# Altium PCB PCB_Layout.PcbDoc (part 1 of 2)
Units mil, origin at the board's own origin, x right, y up, seen from the top; angles counter-clockwise.
Board outline 6000 x 4000 mil, 2 copper layers (Top Layer, Bottom Layer); 69 components, 66 nets, 256 pads, 9 vias.
Unrouted connection lines stored in the file: 15.
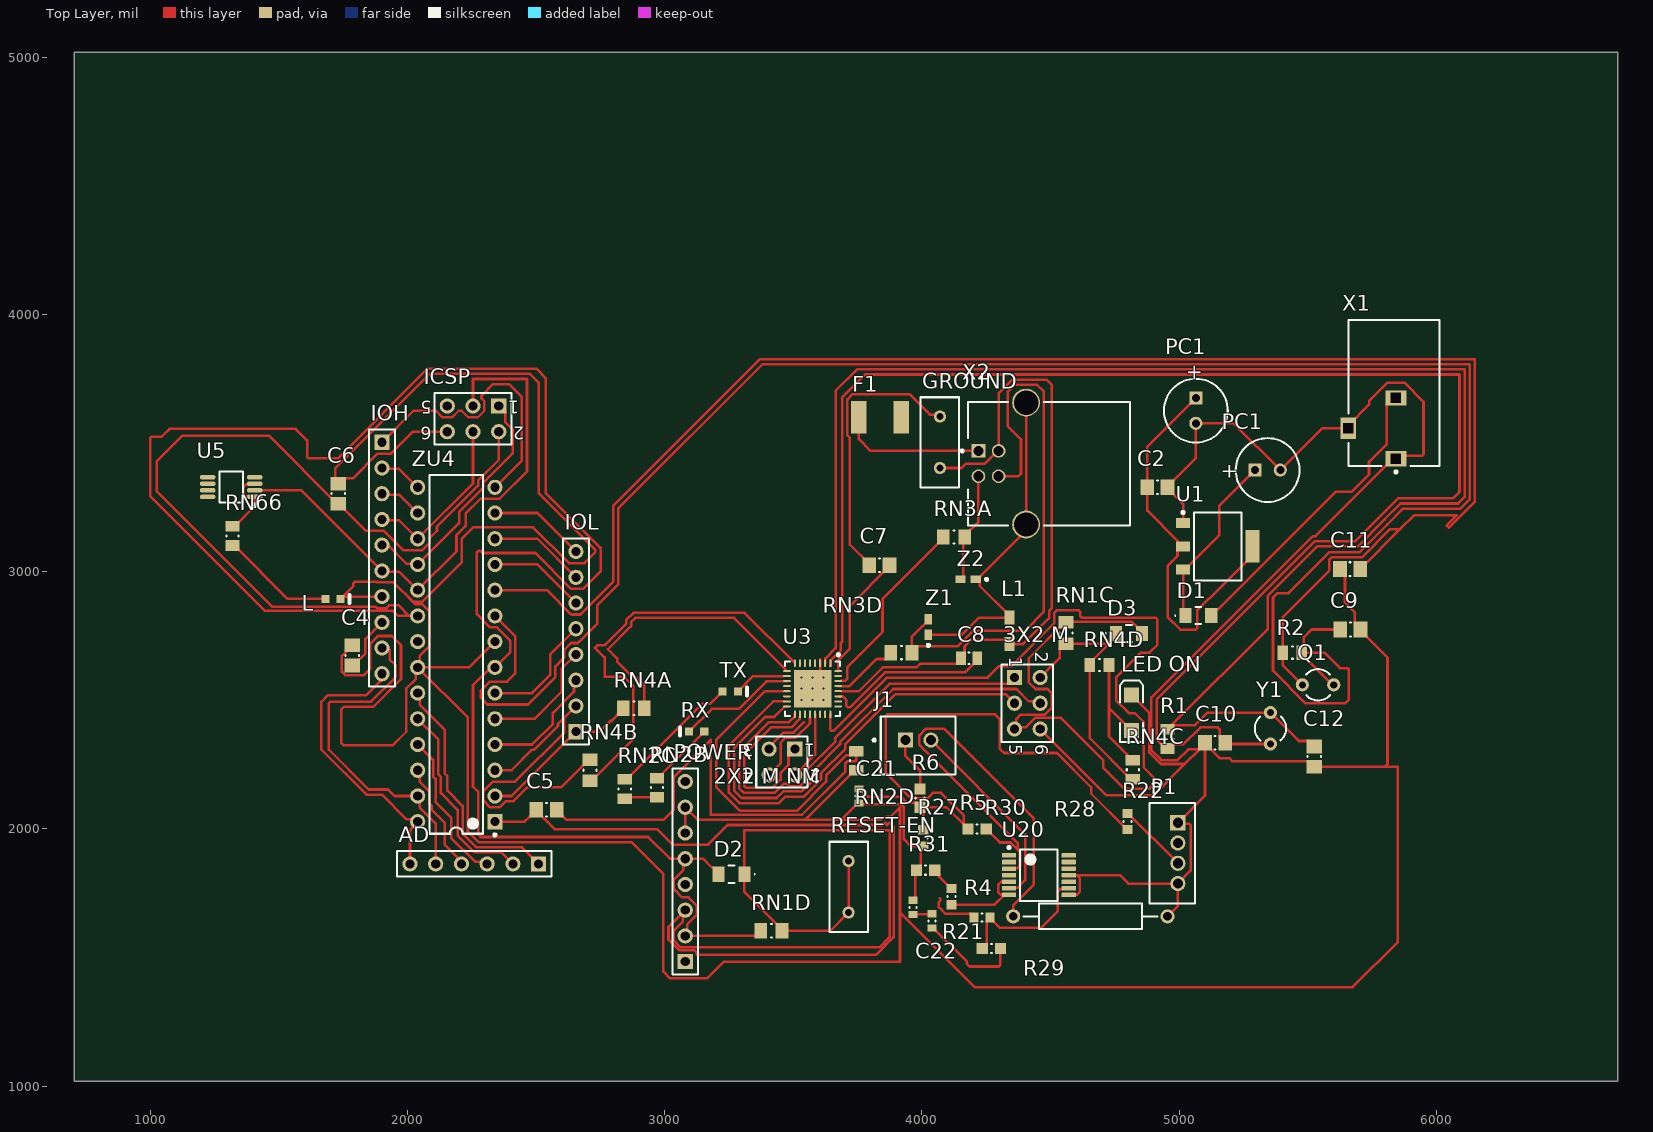
[diagram p0: Top Layer view]
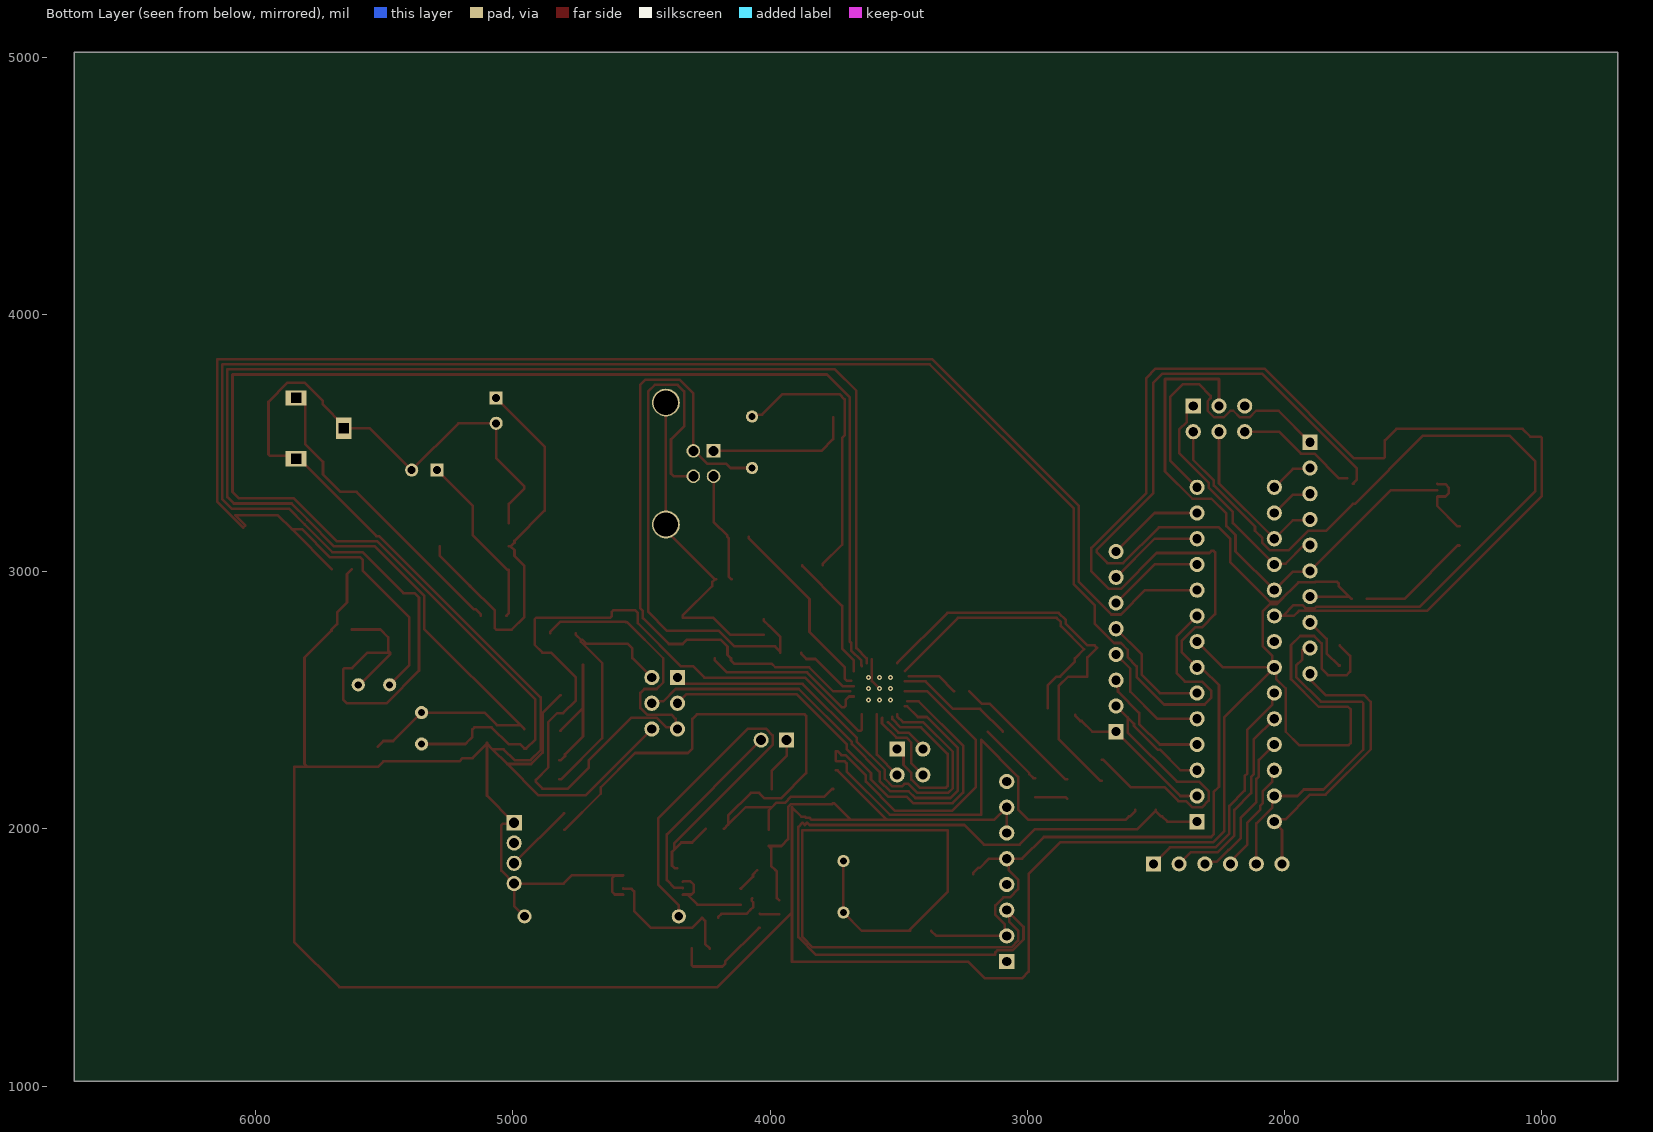
[diagram p1: Bottom Layer view, seen from below]

## Layer stack, top to bottom
Top Solder: solder mask 0.4, Solder Resist, Dk 3.5
Top Layer: signal copper 1.4
Dielectric 1: dielectric 12.6, FR-4, Dk 4.8
Bottom Layer: signal copper 1.4
Bottom Solder: solder mask 0.4, Solder Resist, Dk 3.5

## Board outline
705,1018.98 6705,1018.98 6705,5018.98 705,5018.98

## Design rules (kind name [scope] priority, off if disabled: settings)
Clearance [All] p1: gap=10 ignorepadtopadclearanceinfootprint=FALSE except(0: Arc-Hole Track-Hole SMDPad-Hole THPad-Hole Via-Hole Fill-Hole Poly-Hole Region-Hole Text-Hole)
DiffPairsRouting DiffPairsRouting_1 [All] p2 off: maxlimit=10 minlimit=10 mostfreqgap=10 toplayer_minwidth=15 toplayer_maxwidth=15 toplayer_prefwidth=15 bottomlayer_minwidth=15 bottomlayer_maxwidth=15 bottomlayer_prefwidth=15 maxuncoupledlength=500
PolygonConnect [All] p1: connectstyle=Relief reliefconductorwidth=10 reliefentries=4 polygonreliefangle="90 Angle" airgapwidth=10
RoomDefinition Sheet2 [InComponentClass('Sheet2')] p1: confinementstyle=ConfineIn formatcopy=TRUE lockcomponents=FALSE outline 6750,1080 7320,1080 7320,1440 6750,1440
RoomDefinition Sheet3 [InComponentClass('Sheet3')] p2: confinementstyle=ConfineIn formatcopy=TRUE lockcomponents=FALSE outline 6750,1078.98 7330,1078.98 7330,1478.98 6750,1478.98
RoomDefinition Sheet1 [InComponentClass('Sheet1')] p3: confinementstyle=ConfineIn formatcopy=TRUE lockcomponents=FALSE outline 1703.66,1887.95 7253.66,1887.95 7253.66,4187.95 1703.66,4187.95
RoutingVias [All] p1: holewidth=28 width=50 viastyle="Through Hole" minholewidth=28 minwidth=50 maxholewidth=28 maxwidth=50
SolderMaskExpansion [All] p1: expansion=4
Width [All] p1: maxlimit=10 minlimit=10 preferedwidth=10
30 further rules are at their usual default settings.

## Classes and differential pairs
component class Sheet2: "2X2 M NM" "3X2 M" C7 C8 C10 C12 D3 F1 GROUND L1 R1 RN1C RN2B RN2C RN2D RN3A RN3D RX TX U3 X2 Y1 Z1 Z2
component class Sheet3: C2 C21 C22 D1 J1 L "LED ON" P1 PC1 R4 R5 R6 R21 R22 R27 R28 R29 R30 R31 RN4C RN4D RN66 U1 U5 U20 X1
component class Sheet1: AD C4 C5 C6 C9 C11 D2 ICSP IOH IOL POWER Q1 R2 RESET-EN RN1D RN4A RN4B ZU4

## Components (designator, comment, footprint, x,y, rotation, side; value= is the part's Value field where it differs from the comment)
"2X2 M NM" "JP2" HDR2X2 3506.1,2310 r180 top
"3X2 M" "ICSP1" HDR2X3 4360,2588.31 r270 top
AD "6x1F-H8.5" HDR1X6 2510,1863.98 r180 top
C2 "100nF" CAPC0805(2012)100_M 4915.63,3327.95 r180 top
C4 "100nF" CAPC0805(2012)100_M 1785,2674.61 r270 top
C5 "100nF" CAPC0805(2012)100_M 2540.63,2073.98 r180 top
C6 "100nF" CAPC0805(2012)100_M 1730.63,3302.95 r90 top
C7 "100nF" CAPC0805(2012)100_M 3835,3025 r0 top
C8 "1uF" CAPC0805(2012)145_L 4183.5,2663.08 r0 top
C9 "22pF" CAPC0805(2012)100_M 5665.63,2775 r180 top
C10 "22pF" CAPC0805(2012)100_M 5140,2335 r180 top
C11 "22pF" CAPC0805(2012)100_M 5665,3010 r0 top
C12 "22pF" CAPC0805(2012)100_M 5525,2280.63 r270 top
C21 "100nF" CAPC0603(1608)100_L 3755,2127.44 r90 top
C22 "100nF" CAPC0603(1608)100_L 3965,1695 r90 top
D1 "M7" BOUR-CD1206-S01575-2_L 5075,2829.06 r180 top
D2 "CD1206-S01575" BOUR-CD1206-S01575-2_L 3259.8,1823.98 r0 top
D3 "CD1206-S01575" BOUR-CD1206-S01575-2_L 4805,2760 r180 top
F1 "MF-MSMF050-2" BOUR-MF-MSMF050-2_V 3837.32,3600 r0 top
GROUND "Jumper" RAD-0.2 4070,3502.95 r90 top
ICSP "3X2 M" HDR2X3 2355,3643.98 r180 top
IOH "10x1F-H8.5" HDR1X10 1900.86,3502.95 r270 top
IOL "8x1F-H8.5" HDR1X8 2655,2377.95 r90 top
J1 "" JST-B2B-XH-A_V 3985.79,2345 r0 top
L "Yellow" LTST-C190KSKT_V 1710.47,2893.98 r0 top
L1 "BLM21PG221SN1D" MURA-BLM21-B20-CHIP-2_V2 4340,2770 r90 top
"LED ON" "GREEN" 3.2X1.6X1.1 4815,2451.1 r90 top
P1 "B4B-PH-K-S(LF)(SN)" JST-B4B-PH-K-S_V 4973.35,1905.63 r270 top
PC1 "47u" PNSC-ECA-1HM470 5344.21,3395 r0 top
PC1 "47u" PNSC-ECA-1HM470 5065,3625.79 r270 top
POWER "8x1F-H8.5" HDR1X8 3080,1483.98 r90 top
Q1 "CSTCE16MOV53-R0" R38 5540,2560 r90 top
R1 "1M" RESC0805(2012)_N 4955,2350 r270 top value="1000000.00 Ohm"
R2 "1M" RESC0805(2012)_N 5440,2685 r0 top value="1000000.00 Ohm"
R4 "200K" RESC0603(1608)_M 4270,1535 r0 top value="200000.00 Ohm"
R5 "200K" RESC0603(1608)_M 4215.04,2000 r0 top value="200000.00 Ohm"
R6 "200K" RESC0603(1608)_M 3993.19,2119.57 r90 top value="200000.00 Ohm"
R21 "" AXIAL-0.6 4655,1660 r0 top value=200K
R22 "4K7" RESC0603(1608)_N 4800,2028.5 r90 top value="4700.00 Ohm"
R27 "4K7" RESC0603(1608)_N 4005.35,1965 r90 top value="4700.00 Ohm"
R28 "100K" RESC0603(1608)_N 4233.5,1655 r0 top value="100000.00 Ohm"
R29 "1M" RESC0603(1608)_L 4040,1642.44 r90 top value="1000000.00 Ohm"
R30 "100K" RESC0603(1608)_N 4115,1736.73 r90 top value="100000.00 Ohm"
R31 "200K" RESC0603(1608)_M 4014.57,1839.45 r0 top value="200000.00 Ohm"
RESET-EN "Jumper" RAD-0.2 3715,1775 r90 top
RN1C "10K" RESC0805(2012)_M 4560,2761.61 r90 top value="10000.00 Ohm"
RN1D "10K" RESC0805(2012)_M 3415,1603.98 r0 top value="10000.00 Ohm"
RN2B "1K" RESC0805(2012)_N 2970,2160 r270 top value="1000.00 Ohm"
RN2C "1K" RESC0805(2012)_N 2845,2155 r270 top value="1000.00 Ohm"
RN2D "1K" RESC0805(2012)_N 3745,2265 r270 top value="1000.00 Ohm"
RN3A "22R" RESC0805(2012)_M 4125,3135 r180 top value="22.00 Ohm"
RN3D "22R" RESC0805(2012)_M 3920,2685 r180 top value="22.00 Ohm"
RN4A "1K" RESC0805(2012)_M 2880,2468.98 r180 top value="1000.00 Ohm"
RN4B "1K" RESC0805(2012)_M 2710,2227.95 r90 top value="1000.00 Ohm"
RN4C "1K" RESC0805(2012)_N 4820,2229.8 r90 top value="1000.00 Ohm"
RN4D "1K" RESC0805(2012)_N 4690,2637.6 r0 top value="1000.00 Ohm"
RN66 "1K 5% 0805(2012)" RESC0805(2012)_N 1320,3138.98 r90 top value="1000.00 Ohm"
RX "Yellow" LTST-C190KSKT_V 3124.53,2377.95 r180 top
TX "Yellow" LTST-C190KSKT_V 3255,2534.41 r0 top
U1 "NCP1117ST50T3G" ONSC-SOT-223_N 5150.16,3098.28 r0 top
U3 "ATmega16U2-MU" 32PG_N 3575,2545 r270 top
U5 "LMV358IDGKR" DGK0008A_M 1315,3328.98 r180 top
U20 "LM324MTX" PW0014A_N 4455,1820 r0 top
X1 "POWERSUPPLY_DC21MMX" CUI-PJ-102A_V 5835,3695 r0 top
X2 "USB-B_TH" FCI-61729-0010BLF-6_V 4495,3420 r90 top
Y1 "CSTCE16MOV53-R0" R38 5355,2391.02 r0 top
Z1 "CG0603MLC-05E" BOUR-CG0603-2_V 4025,2785 r90 top
Z2 "CG0603MLC-05E" BOUR-CG0603-2_V 4180,2970 r180 top
ZU4 "ATmega328-PU" 28P3 2190,2677.95 r180 top

## Footprints (in the part's own frame and the unit in brackets; to place one, negate y for a bottom-side part, rotate by r counter-clockwise, add the part's x,y. Pads: shape width x height; smd on the part's side, far side on the other; paste and mask are expansions set on the pad)
3.2X1.6X1.1 [mm] "SMT LED; 2 Flat Leads"
  rect 1.5x1.5 smd: 1(-1.75,0) 2(1.75,0)
  silkscreen extent -2.9,-1.15 3.2,1.15
28P3 [mm] "28-Pin Plastic Dual In-Line Package (PDIP)"
  rect 1.5x1.5 hole 0.9: 1(-3.81,16.51)
  round 1.5 hole 0.9: 2(-3.81,13.97) 3(-3.81,11.43) 4(-3.81,8.89) 5(-3.81,6.35) 6(-3.81,3.81) 7(-3.81,1.27) 8(-3.81,-1.27) 9(-3.81,-3.81) 10(-3.81,-6.35) 11(-3.81,-8.89) 12(-3.81,-11.43) 13(-3.81,-13.97) 14(-3.81,-16.51) 15(3.81,-16.51) 16(3.81,-13.97) 17(3.81,-11.43) 18(3.81,-8.89) 19(3.81,-6.35) 20(3.81,-3.81) 21(3.81,-1.27) 22(3.81,1.27) 23(3.81,3.81) 24(3.81,6.35) 25(3.81,8.89) 26(3.81,11.43) 27(3.81,13.97) 28(3.81,16.51)
  silkscreen extent -3.94,-17.7 2.65,17.93, body extent -3.6,-17.65 3.6,17.65, height 4.58
32PG_N [mm] "QFN, 32-Leads, Body 5x5mm, Pitch 0.5mm, Thermal Pad 3.7x3.7mm, IPC Medium Density"
  oval 0.75x0.2 smd: 1(-2.525,1.75) 2(-2.525,1.25) 3(-2.525,0.75) 4(-2.525,0.25) 5(-2.525,-0.25) 6(-2.525,-0.75) 7(-2.525,-1.25) 8(-2.525,-1.75) 17(2.525,-1.75) 18(2.525,-1.25) 19(2.525,-0.75) 20(2.525,-0.25) 21(2.525,0.25) 22(2.525,0.75) 23(2.525,1.25) 24(2.525,1.75)
  oval 0.2x0.75 smd: 9(-1.75,-2.525) 10(-1.25,-2.525) 11(-0.75,-2.525) 12(-0.25,-2.525) 13(0.25,-2.525) 14(0.75,-2.525) 15(1.25,-2.525) 16(1.75,-2.525) 25(1.75,2.525) 26(1.25,2.525) 27(0.75,2.525) 28(0.25,2.525) 29(-0.25,2.525) 30(-0.75,2.525) 31(-1.25,2.525) 32(-1.75,2.525)
  rect 3.7x3.7 smd: 33(0,0)
  silkscreen extent -3.47,-2.7 2.7,2.7, body extent -2.55,-2.55 2.55,2.55, height 1
AXIAL-0.6 [mm] "Axial Device, Thru-Hole; 2 Leads; 0.6 in Pin Spacing"
  round 1.4 hole 0.85: 1(-7.62,0) 2(7.62,0)
  silkscreen extent -6.6,-1.27 6.6,1.27
BOUR-CD1206-S01575-2_L [mm] "Molded Diode, 2-Leads, Body 3.4x1.7mm, IPC High Density"
  rect 1.2x1.5 smd: 1(-1.275,0) 2(1.275,0)
  silkscreen extent -0.28,-0.85 2.32,0.85, body extent -1.7,-0.85 1.7,0.85, height 0.95
BOUR-CG0603-2_V [mm] "SMD, 2-Leads, Body 1.6x0.8mm, Pitch 1.52mm"
  rect 1.02x0.76 smd: 1(-0.76,0) 2(0.76,0)
  silkscreen extent -1.94,-0.13 -1.7,0.12, body extent -0.8,-0.4 0.8,0.4, height 0.55
BOUR-MF-MSMF050-2_V [mm] "SMD, 2-Leads, Body 4.55x3.24mm"
  rect 1.5x3.2 smd: 1(-2.1,0) 2(2.1,0)
  body extent -2.28,-1.62 2.28,1.62, height 0.85
CAPC0603(1608)100_L [mm] "Chip Capacitor, Body 1.6x0.8mm, Height 1.0mm, IPC High Density"
  rect 0.7x0.9 smd: 1(-0.7,0) 2(0.7,0)
  silkscreen extent -0.05,-0.35 0.05,0.35, body extent -0.87,-0.47 0.88,0.48, height 1
CAPC0805(2012)100_M [mm] "Chip Capacitor, Body 2.0x1.2mm, Height 1.0mm, IPC Low Density"
  rect 1.35x1.55 smd: 1(-1,0) 2(1,0)
  silkscreen extent -0.05,-0.67 0.05,0.67, body extent -1.1,-0.72 1.1,0.72, height 1
CAPC0805(2012)145_L [mm] "Chip Capacitor, Body 2.0x1.2mm, Height 1.45mm, IPC High Density"
  rect 0.95x1.35 smd: 1(-0.8,0) 2(0.8,0)
  silkscreen extent -0.05,-0.58 0.05,0.58, body extent -1.1,-0.72 1.1,0.72, height 1.45
CUI-PJ-102A_V [mm] "THD, 3-Leads, Body 14.4x9mm, Pitch 3mm"
  rect 2.1x1.5 hole 1 square: 1(0.2,-6.5) 2(0.2,-0.5)
  rect 1.5x2.1 hole 1 square: 3(-4.5,-3.5)
  silkscreen extent -4.5,-7.92 4.5,7.2, body extent -4.7,-7.2 4.7,7.2, height 11.5
DGK0008A_M [mm] "TSOP, 8-Leads, Body 3.1x3.1mm, Pitch 0.65mm, IPC Low Density"
  oval 1.55x0.45 smd: 1(-2.325,0.975) 2(-2.325,0.325) 3(-2.325,-0.325) 4(-2.325,-0.975) 5(2.325,-0.975) 6(2.325,-0.325) 7(2.325,0.325) 8(2.325,0.975)
  silkscreen extent -2.45,-1.55 1.15,1.92, body extent -2.45,-1.5 2.45,1.5, height 0.94
FCI-61729-0010BLF-6_V [mm] "Through Hole, 6-Leads, Body 12.2x16mm"
  rect 1.35x1.35 hole 1: 1(1.254,6.99)
  round 1.35 hole 1: 2(-1.246,6.99) 3(-1.246,4.99) 4(1.254,4.99)
  round 2.75 hole 2.4: MH1(-6.016,2.28) MH2(6.024,2.28)
  silkscreen extent -6.1,-8 6.1,8.72, body extent -7.17,-8 7.17,8, height 11.14
HDR1X6 [mm] "Connector; Header; 6 Position"
  rect 1.5x1.5 hole 0.9: 1(0,0)
  round 1.5 hole 0.9: 2(2.54,0) 3(5.08,0) 4(7.62,0) 5(10.16,0) 6(12.7,0)
  silkscreen extent -1.27,-1.27 13.97,1.27
HDR1X8 [mm] "Connector; Header; 8 Position"
  rect 1.5x1.5 hole 0.9: 1(0,0)
  round 1.5 hole 0.9: 2(2.54,0) 3(5.08,0) 4(7.62,0) 5(10.16,0) 6(12.7,0) 7(15.24,0) 8(17.78,0)
  silkscreen extent -1.27,-1.27 19.05,1.27
HDR1X10 [mm] "Connector; Header; 10 Position"
  rect 1.5x1.5 hole 0.9: 1(0,0)
  round 1.5 hole 0.9: 2(2.54,0) 3(5.08,0) 4(7.62,0) 5(10.16,0) 6(12.7,0) 7(15.24,0) 8(17.78,0) 9(20.32,0) 10(22.86,0)
  silkscreen extent -1.27,-1.27 24.13,1.27
HDR2X2 [mm] "Connector; Header; 2x2 Position"
  rect 1.5x1.5 hole 0.9: 1(0,0)
  round 1.5 hole 0.9: 2(0,2.54) 3(2.54,0) 4(2.54,2.54)
  silkscreen extent -1.27,-1.27 3.81,3.81
HDR2X3 [mm] "Connector; Header; 3x2 Position"
  rect 1.5x1.5 hole 0.9: 1(0,0)
  round 1.5 hole 0.9: 2(0,2.54) 3(2.54,0) 4(2.54,2.54) 5(5.08,0) 6(5.08,2.54)
  silkscreen extent -1.27,-1.27 6.35,3.81
JST-B2B-XH-A_V [mm] "Header, 2-Leads, Body 7.4x5.75mm, Pitch 2.5mm"
  rect 1.5x1.5 hole 1: 1(-1.25,0)
  round 1.5 hole 1: 2(1.25,0)
  silkscreen extent -4.47,-3.4 3.7,2.35, body extent -3.7,-3.4 3.7,2.35, height 7
JST-B4B-PH-K-S_V [mm] "Connector, 4-Leads, Body 9.9x4.5mm, Pitch 2mm"
  rect 1.5x1.5 hole 1: 1(-3,0.55)
  round 1.5 hole 1: 2(-1,0.55) 3(1,0.55) 4(3,0.55)
  silkscreen extent -4.95,-2.25 4.95,2.25, body extent -4.95,-2.25 4.95,2.25, height 6
LTST-C190KSKT_V [mm] "SMD, 2-Leads, Body 1.6x0.8mm"
  rect 0.8x0.8 smd: 1(-0.75,0) 2(0.75,0)
  silkscreen extent 1.65,-0.4 1.65,0.4, body extent -0.8,-0.4 0.8,0.4, height 0.9
MURA-BLM21-B20-CHIP-2_V2 [mm] "Chip Ferrite Bead, 2-Leads, Body 2x1.25mm, Height 1.05mm, 35/70um Land Pad Thickness, 2A Rated Current"
  rect 1.4x1 smd: 1(-1.3,0) 2(1.3,0)
  body extent -1,-0.63 1,0.63, height 1.05
ONSC-SOT-223_N [mm] "SOT223, 4-Leads, Body 3.7x6.7mm, Pitch 2.3mm, IPC Medium Density"
  rect 1.35x1 smd: 1(-3.425,2.3) 2(-3.425,0) 3(-3.425,-2.3)
  rect 1.35x3.2 smd: 4(3.425,0)
  silkscreen extent -3.55,-3.35 2.35,3.47, body extent -1.85,-3.35 1.85,3.35, height 1.8
PNSC-ECA-1HM470 [mm]
  rect 1.3x1.3 hole 0.8: 1(-1.25,0)
  round 1.3 hole 0.8: 2(1.25,0)
  silkscreen extent -3.15,-3.15 3.15,3.15, body extent -3.15,-3.15 3.15,3.15, height 12.2
PW0014A_N [mm] "SOP, 14-Leads, Body 5.1x4.5mm, Pitch 0.65mm, IPC Medium Density"
  rrect22% 1.4x0.45 smd: 1(-2.95,1.95) 2(-2.95,1.3) 3(-2.95,0.65) 4(-2.95,0) 5(-2.95,-0.65) 6(-2.95,-1.3) 7(-2.95,-1.95) 8(2.95,-1.95) 9(2.95,-1.3) 10(2.95,-0.65) 11(2.95,0) 12(2.95,0.65) 13(2.95,1.3) 14(2.95,1.95)
  silkscreen extent -3.07,-2.55 1.85,2.85, body extent -3.21,-2.5 3.21,2.5, height 1
R38 [mm] "Crystal, Thru-Hole; 2 Leads; Body 3.1 x 8.2 mm (Dia.xH)"
  round 1.3 hole 0.7: 1(0,1.55) 2(0,-1.55)
  silkscreen extent -1.55,-1.19 1.55,1.17
RAD-0.2 [mm] "Radial Cap, Thru-Hole; 2 Leads; 0.2 in Pin Spacing"
  round 1.2 hole 0.7: 1(-2.54,0) 2(2.54,0)
  silkscreen extent -4.44,-1.91 4.44,1.91
RESC0603(1608)_L [mm] "Chip Resistor, Body 1.6x0.8mm, IPC High Density"
  rect 0.7x0.9 smd: 1(-0.7,0) 2(0.7,0)
  silkscreen extent -0.05,-0.35 0.05,0.35, body extent -0.85,-0.47 0.85,0.47, height 0.6
RESC0603(1608)_M [mm] "Chip Resistor, Body 1.6x0.8mm, IPC Low Density"
  rect 1.1x1.1 smd: 1(-0.9,0) 2(0.9,0)
  silkscreen extent -0.05,-0.45 0.05,0.45, body extent -0.85,-0.47 0.85,0.47, height 0.6
RESC0603(1608)_N [mm] "Chip Resistor, Body 1.6x0.8mm, IPC Medium Density"
  rect 0.9x1 smd: 1(-0.8,0) 2(0.8,0)
  silkscreen extent -0.05,-0.4 0.05,0.4, body extent -0.85,-0.47 0.85,0.47, height 0.6
RESC0805(2012)_M [mm] "Chip Resistor, Body 2.0x1.3mm, IPC Low Density"
  rect 1.25x1.5 smd: 1(-1.05,0) 2(1.05,0)
  silkscreen extent -0.05,-0.65 0.05,0.65, body extent -1.1,-0.67 1.1,0.67, height 0.7
RESC0805(2012)_N [mm] "Chip Resistor, Body 2.0x1.3mm, IPC Medium Density"
  rect 1.05x1.4 smd: 1(-0.95,0) 2(0.95,0)
  silkscreen extent -0.05,-0.6 0.05,0.6, body extent -1.1,-0.67 1.1,0.68, height 0.7

## Part data
"2X2 M NM": library part "Header 2X2", "Header, 2-Pin, Dual row", LatestRevisionDate=17-Jul-2002, LatestRevisionNote="Re-released for DXP Platform.", Publisher="Altium Limited"
"3X2 M" ICSP: library part "Header 3X2", "Header, 3-Pin, Dual row", LatestRevisionDate=17-Jul-2002, LatestRevisionNote="Re-released for DXP Platform.", Publisher="Altium Limited"
AD: library part "Header 6", "Header, 6-Pin", LatestRevisionDate=17-Jul-2002, LatestRevisionNote="Re-released for DXP Platform.", Publisher="Altium Limited"
C2 C4 C5 C6 C7: library part CMP-1036-04420-1, "CAP 100nF 50V ±10% 0805 (2012 Metric) Thickness 1mm SMD", Case-EIA=0805, Case-Metric=2012, Rated Voltage="50 V", Tolerance=±10%, Max Thickness="1 mm", Technology=SMT
C8: library part CMP-1036-04761-1, "CAP 1uF 50V ±10% 0805 (2012 Metric) Thickness 1.45mm SMD", Case-EIA=0805, Case-Metric=2012, Rated Voltage="50 V", Tolerance=±10%, Max Thickness="1.45 mm", Technology=SMT
C9 C10 C11 C12: library part CMP-1036-01242-1, "CAP 22pF 50V ±5% 0805 (2012 Metric) Thickness 1mm SMD", Case-EIA=0805, Case-Metric=2012, Rated Voltage="50 V", Tolerance=±5%, Max Thickness="1 mm", Technology=SMT
C21 C22: library part CMP-1035-02591-1, "CAP 100nF 50V ±5% 0603 (1608 Metric) Thickness 1mm SMD", Case-EIA=0603, Case-Metric=1608, Rated Voltage="50 V", Tolerance=±5%, Max Thickness="1 mm", Technology=SMT
D1: library part CMP-0583-00001-2, "75 V Small Signal Switching Diode, 150 mA, 2.5 uA, 1026 Molded Package, RoHS, Tape and Reel", Average Forward Current="150 mA", Capacitance Between Terminals (Max.)="3 pF", Forward Voltage (Max.)="1.00 V", Manufacturer=Bourns, PartNumber=CD1206-S01575, Reverse Current (Max.)="2.5 uA", Reverse Voltage="75 V", ComponentLink1Description="Manufacturer URL", ComponentLink1URL=http://www.bourns.com/, ComponentLink2Description=Datasheet, ComponentLink2URL=http://www.bourns.com/data/global/pdfs/CD1206_S01575.pdf, ComponentLink3Description="Package Specification", ComponentLink3URL=http://www.bourns.com/data/global/pdfs/CD1206_S01575.pdf, DatasheetVersion="Rev. 06/11", Mounting Technology="Surface Mount", PackageDescription="2-Pin SMD, Body 3.2 x 1.5 mm", PackageReference=CD1206-S01575-2, Packing="Tape and Reel", Reverse Recovery Time (Max.)="4 nS", RoHS=TRUE
D2 D3: library part CMP-0583-00001-2, "75 V Small Signal Switching Diode, 150 mA, 2.5 uA, 1026 Molded Package, RoHS, Tape and Reel", Average Forward Current="150 mA", Capacitance Between Terminals (Max.)="3 pF", Forward Voltage (Max.)="1.00 V", Manufacturer=Bourns, Reverse Current (Max.)="2.5 uA", Reverse Voltage="75 V", ComponentLink1Description="Manufacturer URL", ComponentLink1URL=http://www.bourns.com/, ComponentLink2Description=Datasheet, ComponentLink2URL=http://www.bourns.com/data/global/pdfs/CD1206_S01575.pdf, ComponentLink3Description="Package Specification", ComponentLink3URL=http://www.bourns.com/data/global/pdfs/CD1206_S01575.pdf, DatasheetVersion="Rev. 06/11", Mounting Technology="Surface Mount", PackageDescription="2-Pin SMD, Body 3.2 x 1.5 mm", PackageReference=CD1206-S01575-2, Packing="Tape and Reel", PartNumber=CD1206-S01575, Reverse Recovery Time (Max.)="4 nS", RoHS=TRUE
F1: library part CMP-2100-03653-1, "PTC Resettable Fuse, 15 V, 500 mA, -40 to 85 degC, 2-Pin SMD, RoHS, Tape and Reel", Case/Package=1812, Case Code (Metric)=4532, Current Rating=100A, Manufacturer=Bourns, Max Operating Temperature=85degC, Min Operating Temperature=-40degC, Package Description="2-Pin Surface Mount Device, Body 4.55 x 3.24 mm", Package Quantity=2000, Power Dissipation=800mW, Resistance=150mOhm, Supply Voltage=15V, Case Code (Imperial)=1812, Contact Plating=Gold, Datasheet URL=http://www.bourns.com/docs/Product-Datasheets/mfmsmf.pdf, Datasheet Version="Rev. AG, 08/2016", Height=0.85mm, Lead Free=LeadFree, Length=4.73mm, Manufacturer URL=http://www.bourns.com/, Max Current Rating=100A, Mount=SurfaceMount, Number of Terminals=2, Package Reference=MF-MSMF050-2, Packaging=TapeandReel, Radiation Hardening=No, REACH SVHC=NoSVHC, RoHSCompliant=true, Termination=SMD/SMT, Voltage Rating=15V, Voltage Rating (DC)=15V, Width=3.41mm
GROUND RESET-EN: "Jumper Wire", LatestRevisionDate=17-Jul-2002, LatestRevisionNote="Re-released for DXP Platform.", PackageDescription="Radial Cap, Thru-Hole; 2 Leads; 0.2 in Pin Spacing", PackageReference=RAD-0.2, Published=24-Mar-1999, Publisher="Altium Limited"
IOH: library part "Header 10", "Header, 10-Pin", LatestRevisionDate=17-Jul-2002, LatestRevisionNote="Re-released for DXP Platform.", Publisher="Altium Limited"
IOL POWER: library part "Header 8", "Header, 8-Pin", LatestRevisionDate=17-Jul-2002, LatestRevisionNote="Re-released for DXP Platform.", Publisher="Altium Limited"
J1: library part CMP-2000-05888-1, "Male Header, Pitch 2.5 mm, 1 x 2 Position, Height 7 mm, Tail Length 3.4 mm, -25 to 85 degC, RoHS, Bulk", Manufacturer=JST, Package Description="Male Header, Pitch 2.5 mm, 1 x 2 Position, Height 7 mm, Tail Length 3.4 mm", Package Reference=B2B-XH-A, Datasheet URL=http://www.jst-mfg.com/product/pdf/eng/eXH.pdf, Datasheet Version=05/2016, Manufacturer URL=http://www.jst.com/home2.html, Mounting Technology=ThroughHole, No of Positions=2, Pitch=2.5mm, Style/Orientation=StraightHeader/Plug, Termination=Crimp, Type=ShroudedHeader
L RX TX: library part CMP-1674-00009-1, "LED Uni-Color Yellow, 75 mW, 30 mA, -30 to 85 degC, 2-Pin SMD, RoHS, Tape and Reel", Case\Package=0603, Case Code (Metric)=1608, Max Operating Temperature="155 degC", Min Operating Temperature="-55 degC", Package Quantity=5000, Power Rating="100 mW", Resistance="12 kohm", Tolerance=1%, Voltage Rating="50 V", Case Code (Imperial)=0603, ComponentLink1Description="Manufacturer URL", ComponentLink1URL=http://www.us.liteon.com/, ComponentLink2Description=Datasheet, ComponentLink2URL=http://optoelectronics.liteon.com/upload/download/DS-22-99-0189/S_110_LTST-C190KSKT.pdf, DatasheetVersion="Rev. I, 10/2012", Height="0.45 mm", Length="1.6 mm", Mount="Surface Mount", PackageDescription="2-Pin Surface Mount Device, Body 1.6 x 0.8 mm", PackageReference=C190KSKT, Packaging="Tape and Reel", Pins=2, REACH SVHC="No SVHC", RoHSCompliant=true, Voltage Rating (DC)="50 V", Width="0.8 mm"
L1: library part CMP-0686-00610-2, "Chip Ferrite Bead for Power Lines, 220 Ohm, 2000 mA, -55 to 125 degC, 2 x 1.25 x 1.05 mm SMD, Tape and Reel", DC Resistance="0.045 Ohm Max.", Manufacturer=Murata, Operating Temperature Range="-55 to 125 degC", Rated Current="2000 mA", ComponentLink1Description="Manufacturer URL", ComponentLink1URL=http://www.murata.com/, ComponentLink2Description=Datasheet, ComponentLink2URL=http://www.murata.com/products/catalog/pdf/c31e.pdf, ComponentLink3Description="Package Specification", ComponentLink3URL=http://www.murata.com/products/catalog/pdf/c31e.pdf, DatasheetVersion=08/2013, Impedance (at 100 MHz)="220 Ohm +/- 25%", Mounting Technology="Surface Mount", PackageDescription="2-Pin Chip, Body 2 x 1.25 mm", PackageReference=BLM21_H1050-2, Packing="Tape and Reel", PartNumber=BLM21PG221SN1D
"LED ON": library part LED2, "Typical RED, GREEN, YELLOW, AMBER GaAs LED", LatestRevisionDate=17-Jul-2002, LatestRevisionNote="Re-released for DXP Platform.", PackageDescription="SM LED; 2 Flat Leads", PackageReference=3.2X1.6X1.1, PackageVersion=Feb-2002, Published=8-Jun-2000, Publisher="Altium Limited"
P1: library part CMP-2000-05165-1, "Male Header, Pitch 2 mm, 1 x 4 Position, Height 6 mm, Tail Length 3.4 mm, -25 to 85 degC, RoHS, Bulk", Manufacturer=JST, Datasheet URL=http://datasheet.octopart.com/B4B-PH-K-S%28LF%29%28SN%29-JST-datasheet-10558886.pdf, Datasheet Version=Apr-09, Manufacturer URL=http://www.jst.com/home2.html, No of Positions=4, Pitch=2mm, Style/Orientation=StraightHeader/Plug, Termination=Crimp, Type=ShroudedHeader
PC1 PC1: library part CMP-1665-00013-1, "CAP ALUM 47UF 50V 20% RADIAL", PartNumber=ECA-1HM470, ComponentLink1Description=Datasheet, ComponentLink1URL=http://industrial.panasonic.com/cdbs/www-data/pdf/RDF0000/ABA0000C1047.pdf, PackageReference=ECA-1HM470
Q1 Y1: library part XTAL, "Crystal Oscillator", LatestRevisionDate=17-Jul-2002, LatestRevisionNote="Re-released for DXP Platform.", PackageDescription="Crystal, Thru-Hole; 2 Leads; Body 3.1 x 8.2 mm (Dia.xH)", PackageReference=R38, Published=8-Jun-2000, Publisher="Altium Limited"
R1 R2: library part CMP-1013-00849-1, "1M 0.125W 1% 0805 (2012 Metric)  SMD", Case-EIA=0805, Case-Metric=2012, Power="0.125 W", Tolerance="1 %", Technology=SMT
R4 R5 R6 R31: library part CMP-1012-00129-1, "200K 0.1W 5% 0603 (1608 Metric)  SMD", Case-EIA=0603, Case-Metric=1608, Power="0.1 W", Tolerance="5 %", Technology=SMT
R21: library part "Res Adj2", "Variable Resistor", LatestRevisionDate=17-Jul-2002, LatestRevisionNote="Re-released for DXP Platform.", PackageDescription="Axial Device, Thru-Hole; 2 Leads; 0.6 in Pin Spacing", PackageReference=AXIAL-0.6, Published=8-Jun-2000, Publisher="Altium Limited", Set Position=0.5
R22 R27: library part CMP-1012-00090-1, "4K7 0.1W 5% 0603 (1608 Metric)  SMD", Case-EIA=0603, Case-Metric=1608, Power="0.1 W", Tolerance="5 %", Technology=SMT
R28 R30: library part CMP-1012-00122-1, "100K 0.1W 5% 0603 (1608 Metric)  SMD", Case-EIA=0603, Case-Metric=1608, Power="0.1 W", Tolerance="5 %", Technology=SMT
R29: library part CMP-1012-00849-1, "1M 0.1W 1% 0603 (1608 Metric)  SMD", Case-EIA=0603, Case-Metric=1608, Power="0.1 W", Tolerance="1 %", Technology=SMT
RN1C RN1D: library part CMP-1013-00623-1, "10K 0.125W 1% 0805 (2012 Metric)  SMD", Case-EIA=0805, Case-Metric=2012, Power="0.125 W", Tolerance="1 %", Technology=SMT
RN2B RN2C RN2D RN4C RN4D RN66: library part CMP-1013-00074-1, "1K 0.125W 5% 0805 (2012 Metric)  SMD", Case-EIA=0805, Case-Metric=2012, Power="0.125 W", Tolerance="5 %", Technology=SMT
RN3A RN3D: library part CMP-1013-00034-1, "22R 0.125W 5% 0805 (2012 Metric)  SMD", Case-EIA=0805, Case-Metric=2012, Power="0.125 W", Tolerance="5 %", Technology=SMT
RN4A RN4B: library part CMP-1013-00510-1, "1K 0.125W 1% 0805 (2012 Metric)  SMD", Case-EIA=0805, Case-Metric=2012, Power="0.125 W", Tolerance="1 %", Technology=SMT
U1: library part CMP-0592-00001-2, "1.0 A Low-Dropout Positive Fixed Voltage Regulator, 5 V Vout, 0 to 125 degC, 4-Pin SOT-223, Pb-Free, Tape and Reel", Dropout Voltage="1.2 V", Manufacturer="ON Semiconductor", Nominal Output Voltage="5 V", Operating Temperature="0 to 125 degC", ComponentLink1Description="Manufacturer URL", ComponentLink1URL=http://www.onsemi.com/, ComponentLink2Description=Datasheet, ComponentLink2URL=http://www.onsemi.com/pub_link/Collateral/NCP1117-D.PDF, ComponentLink3Description="Package Specification", ComponentLink3URL=http://www.onsemi.com/pub_link/Collateral/318H-01.PDF, DatasheetVersion="Rev. 26", Iout (Min)="1 A", IQ="6 mA", Mounting Technology="Surface Mount", PackageDescription="4-Pin Small Out-Line Transistor, Body 3.5 x 6.5 mm, Pitch 2.3 mm", PackageReference=SOT-223, Packing="Tape and Reel", PartNumber=NCP1117ST50T3G, RR="61 dB", Vin="20 V"
U3: library part CMP-0095-00115-3, "8-bit AVR Microcontroller, 2.7-5.5V, 16KB Flash, 512 Bytes EEPROM, 512 Bytes SRAM, 32-pin VQFN, Industrial Grade (-40°C to 85°C)", Code_JEDEC=MO-220WHHD-2, ComponentLink1Description="Manufacturer URL", ComponentLink1URL=http://www.atmel.com/, ComponentLink2Description="ATmega8U2/16U2/32U2 Datasheet", ComponentLink2URL=http://www.atmel.com/dyn/resources/prod_documents/doc7799.pdf, ComponentLink3Description="ATmega8U2/16U2/32U2 Summary", ComponentLink3URL=http://www.atmel.com/dyn/resources/prod_documents/7799S.pdf, DatasheetVersion="revD, Nov-2010", PackageDescription="32-Pin Quad Flat No-Lead (QFN) Sawn,  5 x 5 x 1.0 mm Body, Pitch 0.50 mm, 3.60mm Exposed Pad", PackageReference=32PG, PackageVersion="revA, Oct-2008", PartNumber=ATmega16U2-MU, RevisionNote="Schematic symbol corrected"
U5: library part CMP-2100-03651-1, "Low-Voltage Rail-to-Rail Output Operational Amplifier, 2.7 to 5.5 V, -40 to 125 degC, 8-Pin VSSOP (DGK), Green (RoHS & no Sb/Br), Tape and Reel", Case/Package=MSOP, Input Bias Current=250nA, Input Offset Voltage (Vos)=7mV, Manufacturer="Texas Instruments", Max Operating Temperature=85degC, Max Supply Voltage=5.5V, Min Operating Temperature=-40degC, Min Supply Voltage=2.7V, Nominal Supply Current=440uA, Operating Supply Current=210uA, Output Current=160mA, Package Description="8-Pin Thin Small Outline Package, Body 3 x 3 mm, Pitch 0.65 mm", Package Quantity=1, Package Reference=DGK0008A, Supply Voltage=5V, Voltage Gain=100dB, Bandwidth=1MHz, Common Mode Rejection Ratio=50dB, Contact Plating=Gold, Datasheet URL=http://www.ti.com/lit/ds/symlink/lmv358.pdf, Datasheet Version="SLOS263W, 10/2014", Gain Bandwidth Product=1MHz, Height=0.97mm, Lead Free=LeadFree, Length=3mm, Manufacturer URL=http://www.ti.com/, Mount=SurfaceMount, Number of Amplifiers=2, Number of Channels=2, Number of Circuits=2, Number of Elements=2, Number of Pins=8, Output Current per Channel=160mA, Package URL=http://www.ti.com/litv/pdf/mpds028d, Packaging=TapeandReel, Radiation Hardening=No, REACH SVHC=NoSVHC, RoHSCompliant=true, Slew Rate=1V/us, Unity Gain Bandwidth Product=1MHz, Width=3mm
U20: library part CMP-0055-01359-3, "Low Power Quad Operational Amplifier, 14-pin TSSOP", Manufacturer="Texas Instruments", Package Reference=PW0014A, PackageTopMarking=NSZXYTT*LM324*MT, PowerWise=N, Code_JEDEC=MO-153-AB-1, ComponentLink1Description="Datasheet URL", ComponentLink1URL=http://www.ti.com/general/docs/lit/getliterature.tsp?genericPartNumber=LM324-N&fileType=pdf, CompType=Amplifiers, PackageDescription="Molded TSSOP, JEDEC, 5 x 4.4 x 0.9mm Body, 14 Lead, 0.65mm Pitch", PinCount=14, RoHS=N
X1: library part CMP-2000-06899-1, "DC Power Jack, 2.5 A, -25 to 85 degC, 3-Pin THD, RoHS", Current Rating=2.5A, Flammability Rating=UL94V-0, Insulation Resistance=50MOhms, Manufacturer=CUIInc., Operating Temperature Range=-25Cto+85C, Package Description="3-Pin Through Hole Device, Body 14.4 x 9 mm, Pitch 3 mm", Package Reference=PJ-102A, Voltage Rating=24V, Brand=CUI, Connector Type=DCPowerJack, Contact Gender=Male, Contact Material=Copper, Contact Plating=Nickel, Datasheet URL=http://www.mouser.com/ds/2/670/PJ-102A-524195.pdf, Datasheet Version="Rev. 1.03, 04/2016", Factory Pack Quantity=280, Housing Material=PolybutyleneTerephthalate(PBT), Inside Contact Diameter=2mm, Manufacturer URL=http://www.cui.com/, Mounting Angle=Right, Mounting Style=ThroughHole, Mounting Technology=ThroughHole, Outside Contact Diameter=6.5mm, Package URL=http://www.infineon.com/dgdl/Datasheet_TLE8201_Rev20.pdf?folderId=db3a304412b407950112b408e8c90004&fileId=db3a304412b407950112b409a5f20326&sId=db3a30443d67b5ca013d7cbf680d1c42, Product=Jacks, Product Category=DCPowerConnectors, RoHS=True, Termination Style=ThroughHole
X2: library part CMP-0397-00002-2, "Single USB 2.0, B Type, Right Angle Jack, Through Hole, RoHS, Tube", Manufacturer="FCI Electronics", PartNumber=61729-0010BLF, ComponentLink1Description="Manufacturer URL", ComponentLink1URL=http://portal.fciconnect.com/, ComponentLink2Description=Datasheet, ComponentLink2URL=http://portal.fciconnect.com/Comergent//fci/drawing/61729.pdf, ComponentLink3Description="Package Specification", ComponentLink3URL=http://portal.fciconnect.com/Comergent//fci/drawing/61729.pdf, Connector Type=USB-B, DatasheetVersion="Rev. V", Gender=Receptacle, Mounting Technology="Through Hole", Number of Contacts=4, PackageDescription="6-Pin, Through Hole, Body 12.2 x 16 mm", PackageReference=61729-0010BLF, Packing=Tube, RoHS=TRUE, Specifications="USB 2.0"
Z1 Z2: library part CMP-0584-00001-2, "ESD Protector, 5 V Supply, -40 to 85 degC, 1.6 x 0.8 x 0.55 mm SMD, RoHS, Tape and Reel", Manufacturer=Bourns, Operating Temperature="-40 to 85 degC", CO="0.5 pF", ComponentLink1Description="Manufacturer URL", ComponentLink1URL=http://www.bourns.com/, ComponentLink2Description=Datasheet, ComponentLink2URL=http://www.bourns.com/data/global/pdfs/MLC.pdf, DatasheetVersion="Rev. S", Mounting Technology="Surface Mount", PackageDescription="2-Pin SMD, Body 1.6 x 0.8 mm, Pitch 1.52 mm", PackageReference=CG0603-2, Packing="Tape and Reel", PartNumber=CG0603MLC-05E, RoHS=TRUE, RT="1 ns", VC="20 V", VDC="5 V", VT="150 V"
ZU4: library part CMP-0095-00015-2, "8-bit AVR Microcontroller, 32KB Flash, 1KB EEPROM, 2KB SRAM, 28-pin PDIP, Industrial Grade (-40°C to 85°C)", ComponentLink1Description="Manufacturer URL", ComponentLink1URL=http://www.atmel.com/, ComponentLink2Description="ATmega48A/48PA/88A/88PA/168A/168PA/328/328P Datasheet", ComponentLink2URL=http://www.atmel.com/dyn/resources/prod_documents/8271.pdf, ComponentLink3Description="ATmega48A/48PA/88A/88PA/168A/168PA/328/328P Summary", ComponentLink3URL=http://www.atmel.com/dyn/resources/prod_documents/8271S.pdf, DatasheetVersion="revD, May-2011", PackageDescription="28-lead (0.300\"/7.62mm Wide) Plastic Dual Inline Package (PDIP)", PackageReference=28P3, PackageVersion="revB, Sep-2001", RevisionNote="DatasheetVersion updated. URLs added."

## Via types
v1: diameter 19.68, hole 7.87, Top Layer to Bottom Layer, 9 vias

## Nets (pads, with @x,y where several pads share a name; then routed paths per layer and width w, separated by ;. In a path a pad name is that pad's centre, name@x,y a point inside that pad or via, vN(x,y) a via of type N, cw(c..) or ccw(c..) an arc to the next point about the centre after c; other vN are vias at no path point)
GND: "3X2 M.6" "LED ON.2" AD.1 C2.1 C4.1 C6.2 C7.1 C9.1 C10.2 C11.1 C12.2 C21.1 C22.1 C22.2 GROUND.2 ICSP.6 IOH.7 L.2 P1.1 P1.4 PC1.2 POWER.6 POWER.7 R4.2 R21.2 R27.1 R29.1 R29.2 R31.1 RN2D.2 U1.1 U3.3 U3.33 U20.8 U20.11 X1.1 X1.3 ZU4.8 ZU4.22 ZU4.23 | length 24801.4
  Top Layer w10: C6.2 1734.57,3342.32 1720,3356.89 1720,3402.36 2086.61,3768.98 2476.02,3768.98 2510,3735 2510,3305 2730.86,3084.14 2730.86,3075.86 2688.43,3033.43 2627.81,3033.43 2488.76,3172.48 2255.61,3172.48 2210.94,3127.81 2210.94,3035.93 2058.44,2883.43 2021.56,2883.43 1946.56,2958.43 1882.41,2958.43 1880.84,2960 1795.86,2960 1790,2954.14 1790,2943.98 L.2@1748.98,2902.95 ; L.2 L.2@1748.98,2902.95 ; C6.2@1756.14,3363.9 1789.92,3363.9 1884.45,3458.43 1936.6,3458.43 2022.15,3543.98 ICSP.6 ; C4.1 1785.85,2713.13 1745,2672.28 1745,2611.31 1758.28,2598.03 1831.72,2598.03 1856.33,2622.64 1856.33,2721.4 1884.77,2749.83 1939.14,2749.83 1975,2713.98 1975,2582.49 1867.34,2474.83 1754.01,2474.83 1742.44,2463.26 1742.44,2334.69 1751.23,2325.91 1943.77,2325.91 1995.47,2377.61 1995.47,2546.4 2032.5,2583.43 2032.5,2620.45 ZU4.22 ; IOH.7 L.2@1748.98,2902.95 ; 2005,2898.98 2031.29,2872.69 2058.24,2872.69 2084.53,2846.4 2084.53,2709.51 2047.5,2672.48 2047.5,2635.45 ZU4.22 ; ZU4.23 2047.5,2520.45 2047.5,2483.43 2145,2385.92 2145,2215.54 2155,2205.54 2155,2148.98 2215,2088.98 2215,1982.26 2268.76,1928.5 2445.47,1928.5 AD.1 ; ZU4.8 2240,2627.95 ZU4.22 ; POWER.6 POWER.7 3128.98,2035 3686.18,2035 ; 3547.03,2036.52 3738.11,2227.6 RN2D.2 ; v1(3575,2545) 3604.21,2574.21 3604.21,2657.8 U3.3@3604.96,2658.55 ; C7.1 3795.63,3028.94 3720,3104.57 3720,3520 3710.12,3529.88 3710.12,3669.21 3730.91,3690 3951.44,3690 4031.38,3610.06 4062.89,3610.06 GROUND.2 ; C22.1 3966.28,1668.72 4038.72,1668.72 R29.2 ; C22.2 3973.78,1731.34 3973.78,1834.09 R31.1 3995.79,1856.1 3995.79,1923.94 R27.1 3956.5,1933.5 3930,1960 3930,2085 3920,2095 3759.88,2095 C21.1 3751.06,2099.88 3686.18,2035 ; R29.1 4043.94,1614.88 4175,1483.82 4175,1475 4185,1465 4299.14,1465 4305,1470.86 4305,1534.57 R4.2 ; 4460,2388.31 4718.31,2130 4899.57,2130 5021.68,2252.12 ; U20.8 4572.87,1744.96 4603.77,1744.96 4613.7,1754.89 4613.7,1808.34 4603.77,1818.27 4572.87,1818.27 U20.11 4770.61,1820 4803.09,1787.52 P1.4 ; 4815,2520 4884.33,2450.67 4884.33,2296.92 4929.14,2252.12 5021.68,2252.12 ; R21.2 4995,1700 P1.4 ; U1.1 5015.31,3263.7 4955,3324.02 C2.1 4955,3331.89 5065,3441.89 5065,3576.57 5211.85,3576.57 5393.43,3395 5555.63,3557.2 X1.3 5657.83,3569.02 5738.84,3650.02 5738.84,3663.36 5810.48,3735 5875.27,3735 5950,3660.27 5950,3455.86 5944.14,3450 5853.78,3450 X1.1 5831.06,3439.09 5530.25,3138.28 5519.68,3138.28 4892.44,2511.04 4892.44,2305.72 4930.95,2267.2 4993.39,2267.2 5035.67,2309.49 C10.2@5079.06,2309.49 ; C10.2 C10.2@5100.63,2331.06 ; C11.1 5645,2990.63 5645,2880 5683.43,2841.57 5683.43,2796.57 C9.1 5705,2771.06 5810,2666.06 5810,2252.12 5804.14,2246.26 ; ZU4.22 2235,2432.95 2235,1990.54 2277.04,1948.5 2870.47,1948.5 2995,1823.98 2995,1444.83 3020.86,1418.98 3165,1418.98 3230,1483.98 3915,1483.98 3915,1675 ; 3686.18,2035 3838.6,2035 3847.66,2044.06 3861.4,2044.06 3864.52,2047.18 3878.2,2047.18 3915,2083.98 3915,1675 ; 3915,1675 4205,1385 5674.65,1385 5850.35,1560.71 5850.35,2241.26 C12.2 5503.43,2262.83 5207.17,2262.83 5195,2275 5156.69,2275 C10.2@5100.63,2331.06 ; P1.4 5045,1837.52 5045,2014.53 5039.53,2020 5010,2020 5000.63,2029.37 5100.63,2129.37 C10.2@5100.63,2331.06 ; 5021.68,2252.12 C10.2@5079.06,2309.49 ; C10.2@5079.06,2309.49 C10.2@5100.63,2331.06
  other v1: 3531.69,2501.69 3575,2501.69 3618.31,2501.69 3531.69,2545 3618.31,2545 3531.69,2588.31 3575,2588.31 3618.31,2588.31
"Net2X2 M NM_1": "2X2 M NM.1" U3.18 | length 702.5
  Top Layer w10: 3506.1,2310 3481.57,2285.47 3481.57,2248.44 3450.63,2217.5 3450.63,2191.56 3419.07,2160 3315.86,2160 3310,2165.86 3310,2291.66 3412.87,2394.53 3492.65,2394.53 3525.04,2426.92 U3.18@3525.04,2435
"Net2X2 M NM_2": "2X2 M NM.2" U3.21 | length 268.4
  Top Layer w10: 3506.1,2210 3585.04,2288.94 3585.04,2445.39 U3.21
"Net2X2 M NM_3": "2X2 M NM.3" U3.19 | length 184.3
  Top Layer w10: 3406.1,2310 3406.1,2318.55 3462.08,2374.53 3500.93,2374.53 3541.76,2415.36
"Net2X2 M NM_4": "2X2 M NM.4" U3.20 | length 310.3
  Top Layer w10: 3406.1,2210 3450.63,2254.53 3450.63,2334.8 3470.36,2354.53 3509.22,2354.53 3565.04,2410.35 3565.04,2430.82 U3.20@3564.41,2431.45
"Net3X2 M_1": "3X2 M.1" U3.17 | length 1723.4
  Top Layer w10: U3.17 3506.1,2436.89 3484.21,2415 3405.06,2415 3290,2299.94 3290,2157.57 3307.57,2140 3427.36,2140 3462.23,2174.87 3478.26,2174.87 3487.66,2165.47 3524.55,2165.47 3554.39,2195.31 3554.39,2230 3662.44,2338.05 3662.44,2352.44 3873.78,2563.78 4335.47,2563.78 4360,2588.31
"Net3X2 M_3": "3X2 M.3" U3.15 | length 1811.8
  Top Layer w10: U3.15@3465.83,2496.1 3422.82,2496.1 3250,2323.28 3250,2141.01 3291.01,2100 3443.93,2100 3469.4,2125.47 3541.11,2125.47 3607.9,2192.26 3607.9,2216.51 3702.44,2311.05 3702.44,2329.28 3896.94,2523.78 4324.53,2523.78 4360,2488.31
"Net3X2 M_4": "3X2 M.4" U3.16 | length 1863.6
  Top Layer w10: U3.16 3466.89,2476.1 3425.79,2435 3390,2435 3270,2315 3270,2149.29 3299.29,2120 3435.64,2120 3461.11,2145.47 3532.83,2145.47 3574.39,2187.03 3574.39,2221.72 3682.44,2329.77 3682.44,2337.57 3888.65,2543.78 4367.5,2543.78 4415.47,2495.81 4452.5,2495.81 4460,2488.31
"Net3X2 M_5": "3X2 M.5" D3.1 RN1C.2 U3.24 | length 4047.8
  Top Layer w10: U3.24 3643.15,2444.84 3643.15,2386.75 3649.01,2380.9 3657.29,2380.9 3864.7,2588.31 4255,2588.31 4299.53,2632.83 4347.83,2632.83 4514.37,2799.37 4514.37,2839.37 4525,2850 4609.14,2850 4615,2844.14 4615,2827 4620.86,2821.14 4909.14,2821.14 4915,2815.28 4915,2715 4885,2685 4851.5,2685 4754.8,2588.31 4754.8,2499.93 4804.73,2450 4827.47,2450 4862.56,2414.91 4862.56,2239.06 4910.86,2190.76 4910.86,2182.47 4885.12,2156.73 4786.23,2156.73 4705.61,2237.35 4705.61,2265.24 4538.02,2432.83 4441.56,2432.83 4404.53,2395.81 4367.5,2395.81 ; 4360,2388.31 4367.5,2395.81 ; D3.1 4855.2,2765.91 4816.57,2804.53 4561.57,2804.53 RN1C.2 4555.08,2802.95 4415.47,2663.35 4415.47,2569.53 4441.22,2543.78 4489.14,2543.78 4504.53,2528.39 4504.53,2469.86 4478.44,2443.78 4383.78,2443.78 4367.5,2427.5 4367.5,2395.81
NetAD_2: AD.2 ZU4.24 | length 778.7
  Top Layer w10: ZU4.24 2120,2347.95 2120,2212.26 2130,2202.26 2130,2138.98 2195,2073.98 2195,1973.98 2260.47,1908.5 2365.47,1908.5 AD.2
NetAD_3: AD.3 ZU4.25 | length 599.2
  Top Layer w10: ZU4.25 2100,2267.95 2100,2203.98 2110,2193.98 2110,2103.98 2170,2043.98 2170,1963.98 2215.31,1918.67 2218.28,1918.67 2265.47,1871.48 2302.5,1871.48 AD.3
NetAD_4: AD.4 ZU4.26 | length 434.4
  Top Layer w10: ZU4.26 2047.5,2220.45 2047.5,2183.43 2085,2145.92 2085,2098.98 2095,2088.98 2095,2073.98 2145,2023.98 2145,1938.98 2210,1873.98 AD.4
NetAD_5: AD.5 IOH.9 ZU4.27 | length 1322.5
  Top Layer w10: IOH.9@1923.66,2702.95 1931.16,2695.45 1931.16,2658.43 1955,2634.59 1955,2590.78 1859.06,2494.83 1700,2494.83 1694.14,2488.98 1694.14,2308.12 1849.14,2153.12 1925.35,2153.12 1950.52,2127.95 ZU4.27 2047.5,2120.45 2047.5,2083.43 2110,2020.92 AD.5
NetAD_6: AD.6 IOH.10 ZU4.28 | length 1156.6
  Top Layer w10: IOH.10@1923.66,2602.95 1912.26,2591.55 1839.68,2518.98 1690,2518.98 1665,2493.98 1665,2308.98 1840.86,2133.12 1900.86,2133.12 1996.64,2037.34 2030.61,2037.34 ZU4.28 2040,2024.98 2010,1994.98 AD.6
NetC4_2: C4.2 IOH.8 | length 218
  Top Layer w10: C4.2 1788.94,2635.24 1836.33,2682.63 1836.33,2738.43 IOH.8
NetC5_1: C5.1 RN2D.1 U3.13 | length 3044.7
  Top Layer w10: C5.1 2580,2070.04 2601.57,2048.46 2605.51,2048.46 2618.98,2035 2995,2035 3035.47,2075.47 3035.47,2202.42 3180,2346.95 3180,2055 3534.14,2055 3702.44,2223.3 3702.44,2254.48 3711.23,2263.27 3742.41,2263.27 3745,2265.86 RN2D.1 ; U3.13 3390.16,2535.16 3200,2345 3200,2162.72 3292.72,2070 3513.93,2070 3627.9,2183.98 3627.9,2208.23 3706.41,2286.73 3722.44,2286.73 RN2D.1@3738.11,2302.4
NetC5_2: C5.2 D2.2 POWER.3 RESET-EN.1 RESET-EN.2 RN1D.2 ZU4.1 | length 6089.9
  Top Layer w10: ZU4.1 2455.24,2027.95 2475.75,2048.46 2479.68,2048.46 C5.2@2501.26,2070.04 ; C5.2 C5.2@2501.26,2070.04 ; POWER.3 POWER.3@3070.61,1674.59 ; RESET-EN.2 RESET-EN.1 3643.98,1603.98 RN1D.2 3456.34,1608.9 3310,1755.24 D2.2 3310,1995 3875,1995 3875,1580 3834.45,1539.45 3061.56,1539.45 3035.47,1565.53 3035.47,1604.76 3070.61,1639.9 POWER.3@3070.61,1674.59 ; C5.2@2501.26,2070.04 2572.63,1998.67 2970,1998.67 3030,1938.67 3168.67,1938.67 3245,2015 3846.88,2015 3855.94,2024.06 3865,2015 3874.08,2024.08 3890,2008.17 3890,1578.98 3821.02,1510 3124.53,1510 3124.53,1519.72 3115.74,1528.5 3056.5,1528.5 3015,1570 3015,1618.98 POWER.3@3070.61,1674.59
NetC8_1: C8.1 GROUND.1 L1.1 U3.28 X2.4 | length 2588.4
  Top Layer w10: U3.28@3688.55,2534.72 3754.55,2534.72 3848.13,2628.31 3979.99,2628.31 3993.19,2641.51 4138.31,2641.51 4152.01,2655.21 C8.1 4165.71,2676.78 4165.71,2708.55 4192.63,2735.47 4323.35,2735.47 L1.1 4393.35,2718.82 4494.37,2819.84 4494.37,2847.65 4505,2858.28 4505,3726.3 4485,3746.3 4351.72,3746.3 4298.54,3693.13 X2.4 4294.37,3469.37 4245,3420 4171.06,3420 4154.02,3402.95 GROUND.1
NetC8_2: C8.2 U3.27 | length 655.2
  Top Layer w10: U3.27 3675.16,2514.72 3693.08,2514.72 3706.56,2501.25 3706.56,2478.44 3712.41,2472.59 3720.7,2472.59 3856.42,2608.31 4168.1,2608.31 4215,2655.21 C8.2
NetC9_2: C9.2 Q1.2 R2.2 ZU4.9 | length 7911.1
  Top Layer w10: ZU4.9 2420,2747.95 2420,2605.12 2387.36,2572.48 2321.56,2572.48 2284.45,2535.37 2284.45,2510 2311.02,2483.43 2468.28,2483.43 2575,2590.14 2575,2631.87 2610.47,2667.34 2610.47,2696.4 2636.56,2722.48 2662.5,2722.48 2738.43,2798.41 2738.43,2870.12 2820,2951.7 2820,3246.72 3379.58,3806.3 6128.7,3806.3 6130,3805 6130,3281.66 6093.34,3245 5870,3245 5809.17,3184.17 5809.17,3182.45 5702.23,3075.51 5584.56,3075.51 5425.39,2916.35 5382.6,2916.35 5365,2898.75 5365,2615 5491.69,2488.31 5645,2488.31 5660,2503.31 5660,2619.14 5654.14,2625 5625,2625 5565,2685 R2.2 ; Q1.2@5599.4,2564.4 5591.11,2564.4 5477.4,2678.11 R2.2 ; C9.2 5515,2775 5485,2745 5485,2692.6 R2.2
NetC10_1: C10.1 R1.2 U3.1 Y1.2 | length 6159.8
  Top Layer w10: U3.1@3643.15,2632.83 3643.15,2635.06 3644.96,2636.87 3644.96,2654.17 3685,2694.21 3685,2722.55 3690.12,2727.67 3690.12,3677.49 3778.93,3766.3 6090,3766.3 6090,3310 6065,3285 5851.72,3285 5685,3118.28 5527.97,3118.28 4912.44,2502.76 4912.44,2348.27 4948.11,2312.6 R1.2 4970.67,2328.27 5015.6,2328.27 5082.33,2395 5150,2395 5157.8,2387.2 5157.8,2356.57 C10.1 5184.37,2330 Y1.2
NetC11_2: C11.2 Q1.1 R2.1 ZU4.10 | length 6578.7
  Top Layer w10: ZU4.10 2542.03,2927.95 2636.56,2833.43 2673.44,2833.43 2800,2959.98 2800,3255 3371.3,3826.3 6150,3826.3 6150,3273.37 6048.31,3171.69 6040,3180 6080,3220 5914.37,3220 5859.37,3165 ; Q1.1 5402.6,2636.38 R2.1 5402.6,2822.6 5584.06,3004.06 5584.06,3046.72 5592.84,3055.51 5710.51,3055.51 5820,3165 5859.37,3165 ; C11.2 5859.37,3165
NetC12_1: C12.1 R1.1 U3.2 Y1.1 | length 6286.6
  Top Layer w10: U3.2 3624.96,2645.16 3624.96,2663.08 3665,2703.12 3665,3703.28 3748.01,3786.3 6110,3786.3 6110,3290 6085,3265 5860,3265 5798.75,3203.75 5798.75,3202.03 5695,3098.28 5536.25,3098.28 5345,2907.03 5345,2777.4 R1.1@4970.67,2403.07 ; R1.1 R1.1@4970.67,2403.07 ; C12.1 5503.43,2341.57 5465.47,2341.57 Y1.1 5111.09,2452.05 5062.12,2403.07 R1.1@4970.67,2403.07
NetC21_2: C21.2 R5.1 R6.1 R22.1 R27.2 | length 2438.5
  Top Layer w10: C21.2 3758.94,2155 3788.94,2125 3918.28,2125 3942.5,2100.79 3976.54,2100.79 R6.1 ; R27.2 4005.35,2071.97 R6.1 ; R5.1 R5.1@4162.95,2016.65 ; R22.1 4798.03,1997.01 4658.42,2136.62 4658.42,2161.61 4525.02,2295 4320,2295 4302.5,2312.5 4302.5,2427.5 4285,2445 3865.86,2445 3860,2439.14 3860,2216.57 3958.23,2118.35 4021.06,2118.35 4042.71,2140 4075,2140 4162.95,2052.05 R5.1@4162.95,2016.65 ; R6.1 4095.47,2084.13 R5.1@4162.95,2016.65
NetD1_1: D1.1 X1.2 | length 1191.3
  Top Layer w10: D1.1 5125.2,2834.96 5143.82,2853.58 5151.08,2853.58 5607.5,3310 5670,3310 5738.27,3378.27 5738.27,3426.57 5806.54,3494.84 5806.54,3650.79 5831.06,3675.32 X1.2
NetD1_2: D1.2 PC1.1@5295,3395 U1.3 | length 689.8
  Top Layer w10: D1.2 5015.31,2838.54 U1.3 5022.2,3007.73 5155.65,3141.18 5155.65,3255.65 PC1.1@5295,3395
NetF1_1: F1.1 X2.1 | length 568.9
  Top Layer w10: F1.1 3754.65,3515.35 3800.63,3469.37 X2.1
NetF1_2: F1.2
NetICSP_1: ICSP.1 IOH.5 ZU4.18 | length 939.4
  Top Layer w10: IOH.5@1923.66,3102.95 1995.47,3031.14 2036.81,3031.14 ZU4.18 2200.71,3188.66 2200.71,3232.09 2295.47,3326.86 2295.47,3346.4 2409.88,3460.81 2409.88,3552.06 2379.53,3582.42 2379.53,3619.45 ICSP.1
NetICSP_3: ICSP.3 IOH.6 U5.2 ZU4.19 | length 2126.9
  Top Layer w10: U5.2 1587.63,3316.18 IOH.6 ; IOH.6@1923.66,3002.95 1926.85,2999.76 1968.19,2999.76 ZU4.19 2190.94,3078.9 2190.94,3141.87 2226.33,3177.26 2226.33,3225.31 2284.45,3283.43 2358.44,3283.43 2465,3389.98 2465,3748.98 2255,3748.98 ICSP.3
NetICSP_4: ICSP.4 IOH.4 ZU4.17 | length 652.5
  Top Layer w10: IOH.4@1923.66,3202.95 1926.85,3199.76 1968.19,3199.76 ZU4.17 2255,3342.95 ICSP.4
NetIOH_1: IOH.1 ZU4.14 | length 1147.5
  Top Layer w10: IOH.1 2023.44,3625.53 2110.47,3625.53 2136.56,3599.45 2173.44,3599.45 2199.53,3625.53 2210.47,3625.53 2236.56,3599.45 2273.44,3599.45 2299.53,3625.53 2299.53,3662.42 2287.11,3674.83 2287.11,3683.12 2332.97,3728.98 2395,3728.98 2445,3678.98 2445,3432.95 ZU4.14
NetIOH_2: IOH.2 ZU4.15 | length 147.4
  Top Layer w10: IOH.2@1923.66,3402.95 1926.85,3399.76 1968.19,3399.76 ZU4.15
NetIOH_3: IOH.3 ZU4.16 | length 147.4
  Top Layer w10: IOH.3@1923.66,3302.95 1926.85,3299.76 1968.19,3299.76 ZU4.16
NetIOL_1: IOL.1 RN4A.2 ZU4.2 | length 609.1
  Top Layer w10: ZU4.2@2347.5,2150 2369.55,2127.95 2405,2127.95 IOL.1 2747.64,2377.95 2789.13,2419.45 2794.06,2419.45 2813.66,2439.06 2813.66,2443.98
NetIOL_2: IOL.2 RN4B.2 ZU4.3 | length 1430.5
  Top Layer w10: ZU4.3 2405,2227.95 2485,2307.95 2493.28,2307.95 2585.31,2399.98 2585.31,2408.26 2610.47,2433.43 ; IOL.2 2610.47,2433.43 ; RN4B.2 2705.08,2269.29 2598.13,2162.34 2467.67,2162.34 2413.28,2107.95 2382.97,2107.95 2358.44,2083.43 2321.56,2083.43 2295.47,2109.51 2295.47,2146.4 2332.5,2183.43 2418.43,2183.43 2610.47,2375.47 2610.47,2433.43
NetIOL_3: IOL.3 ZU4.4 | length 465.4
  Top Layer w10: ZU4.4 2485,2327.95 2565.31,2408.26 2565.31,2451.23 2647.5,2533.43 2647.5,2570.45 IOL.3
NetIOL_4: IOL.4 ZU4.5 | length 470.7
  Top Layer w10: ZU4.5 2493.98,2427.95 2600,2533.98 2600,2622.95 IOL.4
NetIOL_5: IOL.5 ZU4.6 | length 465.1
  Top Layer w10: ZU4.6 2484.53,2527.95 2555,2598.43 2555,2677.95 IOL.5
NetIOL_6: IOL.6 ZU4.11 | length 377.1
  Top Layer w10: ZU4.11 2505,3027.95 IOL.6
NetIOL_7: IOL.7 ZU4.12 | length 377.1
  Top Layer w10: ZU4.12 2505,3127.95 IOL.7
NetIOL_8: IOL.8 ZU4.13 | length 377.1
  Top Layer w10: ZU4.13 2505,3227.95 IOL.8
NetJ1_1: J1.1 R6.2 | length 214.8
  Top Layer w10: J1.1 3935,2343.43 3935,2285 3993.19,2226.81 R6.2
NetJ1_2: J1.2 U20.6 | length 772
  Top Layer w10: J1.2 4401.42,1978.58 4401.42,1800.48 4371.49,1770.55 4340.59,1770.55 U20.6
NetL1_2: L1.2 X2.MH1 X2.MH2 Z1.1 Z2.1 | length 1314
  Top Layer w10: Z1.1 4155.67,2755.08 4221.77,2821.18 L1.2 4340,2829.06 4225,2944.05 4225,2960.04 Z2.1@4215.04,2970 ; Z2.1 Z2.1@4215.04,2970 ; X2.MH2 X2.MH1 4405.24,3160.2 Z2.1@4215.04,2970
NetL_1: L.1 RN66.1 | length 446.9
  Top Layer w10: RN66.1 1326.89,3101.57 1534.49,2893.98 L.1
"NetLED ON_1": "LED ON.1" RN4C.2 RN4D.2 | length 536.7
  Top Layer w10: RN4D.2 4727.4,2469.8 ; 4815,2382.2 4727.4,2469.8 ; RN4C.2 4813.11,2267.2 4797.44,2282.87 4797.44,2289.76 4727.4,2359.8 4727.4,2469.8
NetPOWER_4: POWER.4
NetPOWER_8: POWER.8
NetR4_1: R4.1 R28.2 U20.9 | length 564.6
  Top Layer w10: R4.1 4252.28,1552.72 4252.28,1642.28 R28.2 4265,1653.03 4303.03,1615 4462.17,1615 4528.58,1681.42 4528.58,1757.16 4538.51,1767.09 4569.41,1767.09 U20.9
NetR5_2: R5.2 R21.1 U20.3 | length 1860.3
  Top Layer w10: R5.2 4303.45,1947.02 4345.1,1947.02 4372.12,1920 ; R21.1 4355,1702.88 4435,1782.88 4435,2040 4085.47,2389.53 4016.56,2389.53 3990.47,2363.44 3990.47,2326.56 4372.12,1944.91 4372.12,1920 ; U20.3@4361.42,1847.32 4371.49,1847.32 4381.42,1857.25 4381.42,1910.7 4372.12,1920
NetR28_1: R28.1 U20.1 U20.2 | length 191.6
  Top Layer w10: 4070,1730 4071.43,1728.57 4071.43,1720.28 4065.5,1714.35 4065.5,1697.21 4077.93,1684.78 4077.93,1683.69 4091.94,1669.69 4189.29,1669.69 4202.01,1656.97 R28.1
NetR30_1: R30.1 U20.5 U20.7 | length 363.7
  Top Layer w10: R30.1 4282.17,1705.24 4320.16,1743.23 U20.7 4337.13,1744.96 4306.23,1744.96 4296.3,1754.89 4296.3,1782.75 4309.69,1796.14 4337.13,1796.14 U20.5
NetR30_2: R30.2 R31.2 U20.10 | length 99.3
  Top Layer w10: R31.2 4066.65,1822.8 4066.65,1814.61 4113.03,1768.23 R30.2
NetRN2B_1: RN2B.1 RX.1 | length 260.8
  Top Layer w10: RN2B.1 2976.89,2197.4 2992.56,2213.07 2992.56,2216.46 RX.1
NetRN2C_1: RN2C.1 TX.1 | length 522.1
  Top Layer w10: RN2C.1 2851.89,2192.4 3146.34,2486.85 3177.91,2486.85 TX.1
NetRN3A_1: RN3A.1 X2.2 Z2.2 | length 429.8
  Top Layer w10: Z2.2 4160.04,2979.96 4160.04,3128.7 RN3A.1 4166.34,3139.92 4219.8,3193.39 X2.2
NetRN3A_2: RN3A.2 U3.30 | length 734.6
  Top Layer w10: U3.30@3684.17,2575.28 3700.28,2575.28 3710,2585 3710,2629.06 3846.88,2765.94 3846.88,2893.3 4083.66,3130.08 RN3A.2
NetRN3D_1: RN3D.1 X2.3 Z1.2 | length 2183.5
  Top Layer w10: RN3D.1 RN3D.1@3961.34,2689.92 ; Z1.2 4025,2809.8 4005.35,2790.16 4003.83,2790.16 3961.34,2747.67 RN3D.1@3961.34,2689.92 ; X2.3 4375.32,3370.94 4385.24,3380.86 4385.24,3514.02 4334.14,3565.12 4334.14,3700.44 4360,3726.3 4448.51,3726.3 4474.37,3700.44 4474.37,2844.37 4400,2770 4198.87,2770 4138.4,2709.53 3980.94,2709.53 RN3D.1@3961.34,2689.92
NetRN3D_2: RN3D.2 U3.29 | length 261
  Top Layer w10: U3.29 3718.43,2554.84 3824.06,2660.47 3859.06,2660.47 3878.66,2680.08 RN3D.2
NetRN4A_1: RN4A.1 U3.9 | length 1135.9
  Top Layer w10: RN4A.1 2921.34,2556.73 2885.96,2592.11 2872.89,2592.11 2815.2,2649.8 2815.2,2662.87 2779.82,2698.25 2870,2788.43 2870,2803.45 2886.55,2820 3269.49,2820 U3.9
NetRN4B_1: RN4B.1 U3.8 | length 1618.7
  Top Layer w10: RN4B.1 2714.92,2186.61 2878.27,2349.96 2878.27,2554.84 2840.96,2592.15 2766.36,2592.15 2766.36,2666.75 2729.06,2704.06 2738.43,2713.43 2766.71,2713.43 2850,2796.72 2850,2811.73 2878.27,2840 3310.51,2840 U3.8